# EAGLE board displayBoard (EAGLE 9.6.1)
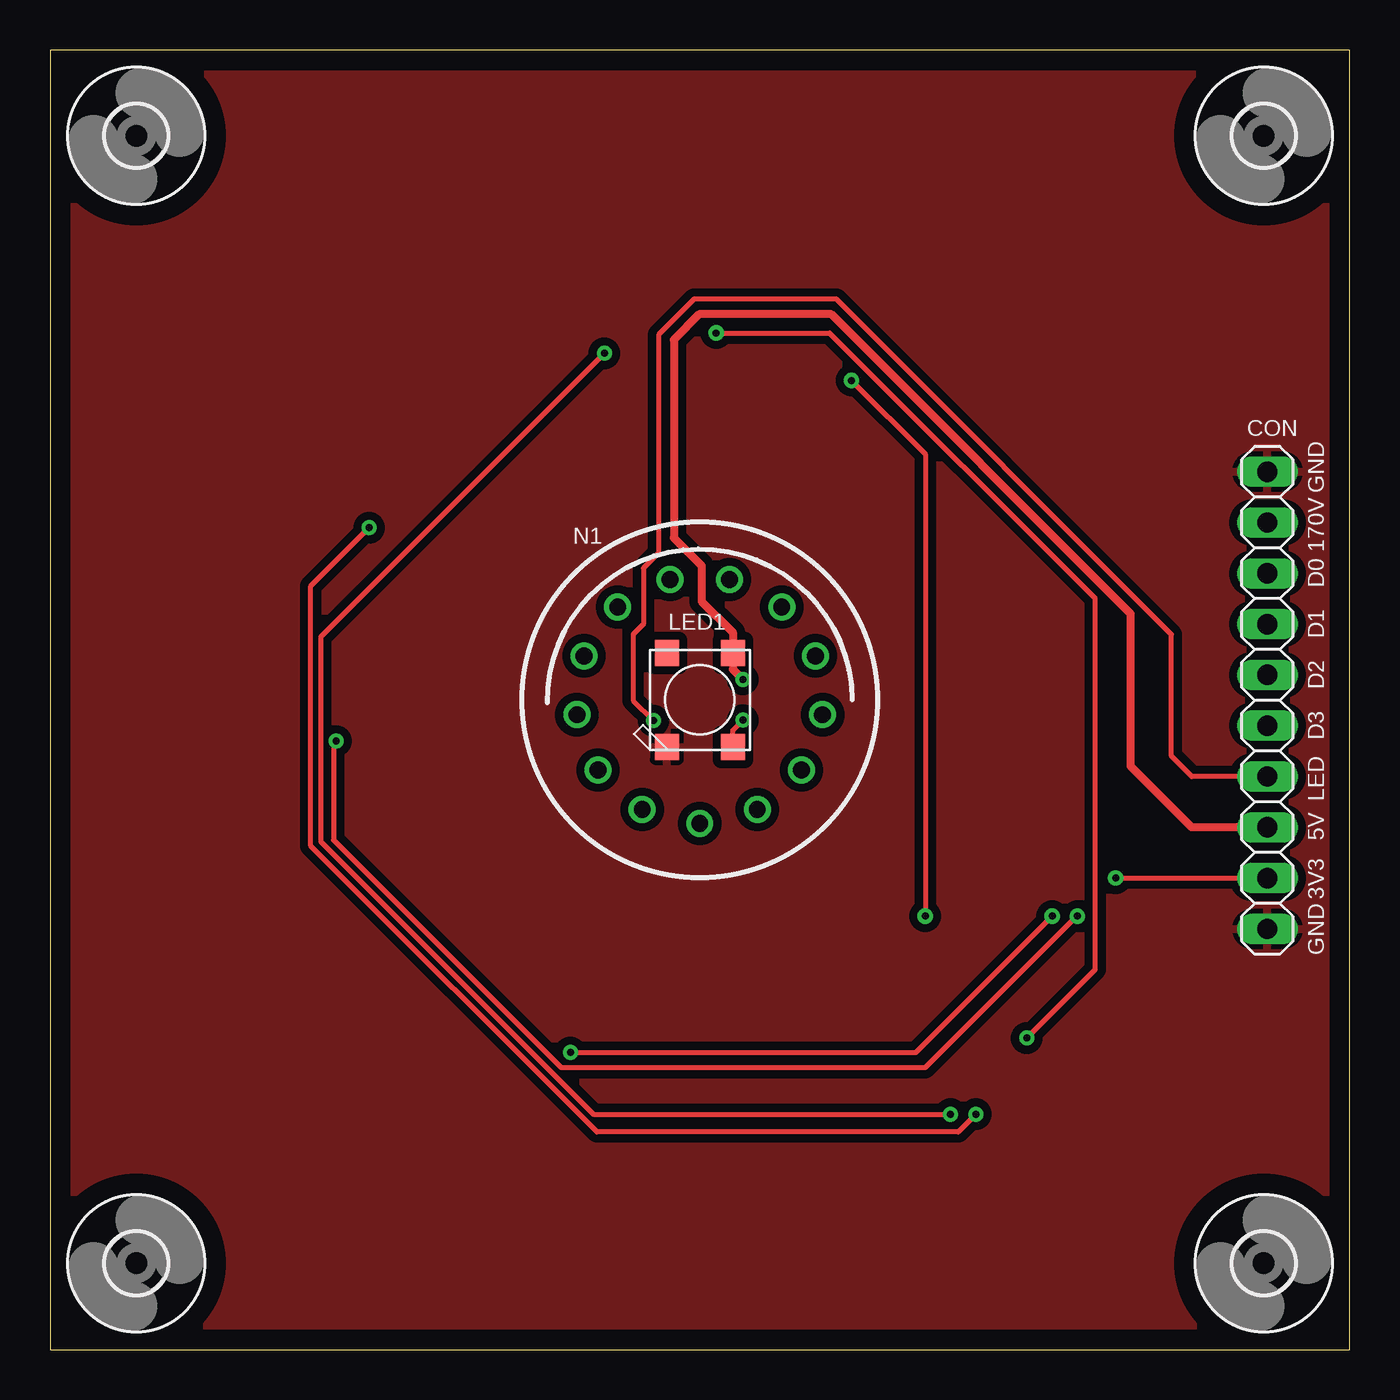
[diagram p0: board, top side]
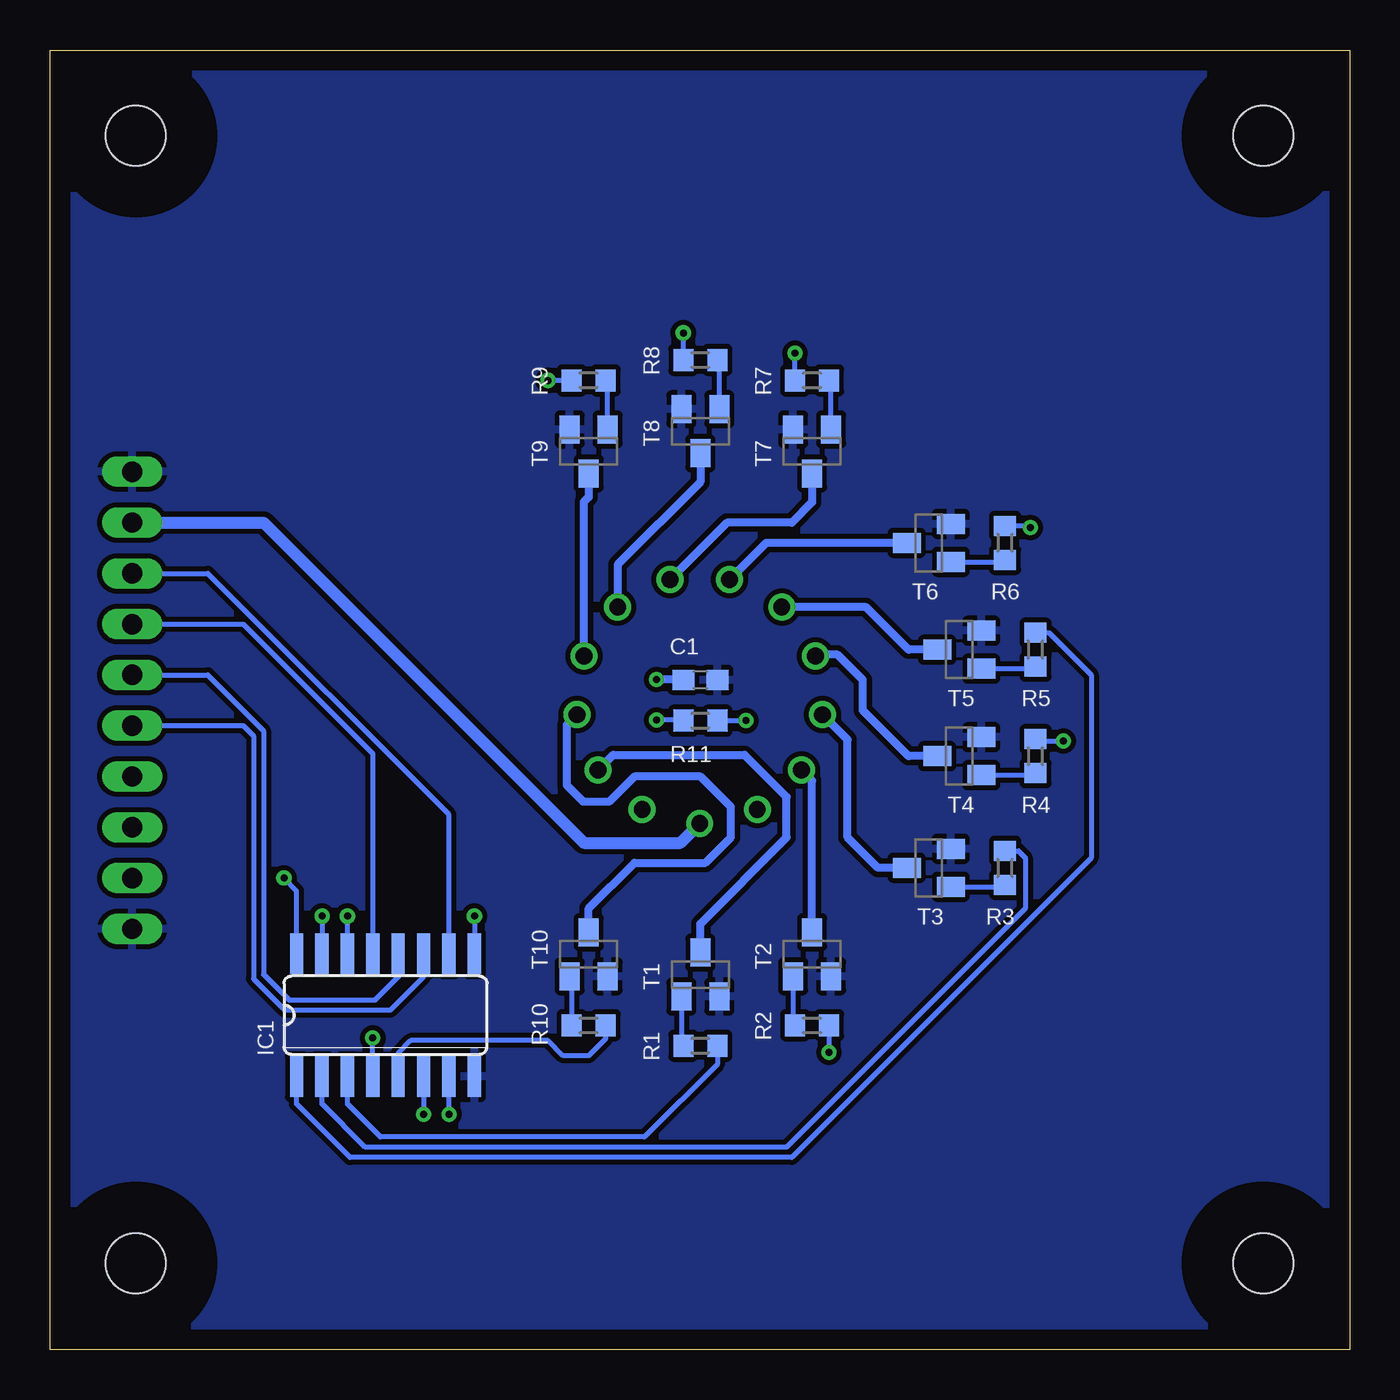
[diagram p1: board, bottom side, seen from below]

Size 65 x 65 mm. Coordinates in mm from the lower left corner, seen from the top.
Outline: 0,0 65,0 65,65 0,65 0,0
Copper layers (1*16): Top 0.035mm / dielectric 1.5mm / Bottom 0.035mm
Design rules "default *": minimum track width 6mil, minimum drill 0.35mm, track to track 10mil, track to pad 6mil, pad to pad 6mil, via to via 6mil, smd to smd 6mil, copper to edge 40mil, drill to drill 6mil, minimum pad ring 10mil, minimum via ring 8mil, stop-mask expansion 4mil, vias tented up to drill 0mil, thermal gap 10mil

## Footprints (pad centres in the part's own frame; a part is rotated, then mirrored left to right if it is on the bottom)
C0603 = smd 1.1 x 1: 1 -0.85,0; 2 0.85,0
1X10 = drill 1.016 long: 1 -11.43,0; 2 -8.89,0; 3 -6.35,0; 4 -3.81,0; 5 -1.27,0; 6 1.27,0; 7 3.81,0; 8 6.35,0; 9 8.89,0; 10 11.43,0
3,0 = hole 3: 0,0
SO16 = smd 0.66 x 2.032: 1 -4.445,-3.073; 2 -3.175,-3.073; 3 -1.905,-3.073; 4 -0.635,-3.073; 5 0.635,-3.073; 6 1.905,-3.073; 7 3.175,-3.073; 8 4.445,-3.073; 9 4.445,3.073; 10 3.175,3.073; 11 1.905,3.073; 12 0.635,3.073; 13 -0.635,3.073; 14 -1.905,3.073; 15 -3.175,3.073; 16 -4.445,3.073
WS2812B-NARROW = smd 1.3 x 1.2: 1-VDD 2.35,-1.65; 2-DOUT 2.35,1.65; 3-GND -2.35,1.65; 4-DIN -2.35,-1.65
IN-14 = drill 0.84: 0 5.094,-3.516; 1 -5.094,-3.516; 2 -6.145,-0.746; 3 -5.788,2.195; 4 -4.105,4.633; 5 -1.481,6.01; 6 1.481,6.01; 7 4.105,4.633; 8 5.788,2.195; 9 6.145,-0.746; A 0,-6.19; LHDP 2.877,-5.481; RHDP -2.877,-5.481
R0603 = smd 1 x 1.1: 1 -0.85,0; 2 0.85,0
SOT23-BEC = smd 1 x 1.4: B -0.95,-1.1; C 0,1.1; E 0.95,-1.1

## Placement (x,y rotation side)
C1  100n  [C0603]  32.47,33.49 180 bottom
CON  [1X10]  60.89,32.47 270 top
H1  MOUNT-HOLE3.0  [3,0]  60.71,60.71 0 top
H2  MOUNT-HOLE3.0  [3,0]  4.32,60.71 0 top
H3  MOUNT-HOLE3.0  [3,0]  4.32,4.32 0 top
H4  MOUNT-HOLE3.0  [3,0]  60.71,4.32 0 top
IC1  4028D  [SO16]  48.22,16.72 0 bottom
LED1  WS2812B_5050N  [WS2812B-NARROW]  32.5,32.5 90 top
N1  IN-14  [IN-14]  32.5,32.5 0 top
R1  4k7  [R0603]  32.47,15.2 180 bottom
R2  4k7  [R0603]  26.88,16.22 180 bottom
R3  4k7  [R0603]  17.23,24.09 270 bottom
R4  4k7  [R0603]  15.71,29.68 270 bottom
R5  4k7  [R0603]  15.71,35.01 270 bottom
R6  4k7  [R0603]  17.23,40.35 270 bottom
R7  4k7  [R0603]  26.88,48.47 0 bottom
R8  4k7  [R0603]  32.47,49.49 0 bottom
R9  4k7  [R0603]  38.06,48.47 0 bottom
R10  4k7  [R0603]  38.06,16.22 180 bottom
R11  470  [R0603]  32.47,31.46 180 bottom
T1  MMBTA42  [SOT23-BEC]  32.47,18.76 0 bottom
T2  MMBTA42  [SOT23-BEC]  26.88,19.77 0 bottom
T3  MMBTA42  [SOT23-BEC]  21.04,24.09 90 bottom
T4  MMBTA42  [SOT23-BEC]  19.52,29.68 90 bottom
T5  MMBTA42  [SOT23-BEC]  19.52,35.01 90 bottom
T6  MMBTA42  [SOT23-BEC]  21.04,40.35 90 bottom
T7  MMBTA42  [SOT23-BEC]  26.88,44.92 180 bottom
T8  MMBTA42  [SOT23-BEC]  32.47,45.93 180 bottom
T9  MMBTA42  [SOT23-BEC]  38.06,44.92 180 bottom
T10  MMBTA42  [SOT23-BEC]  38.06,19.77 0 bottom

## Library data of the parts
C1 R1-R11 = resistor
CON = pinhead
H1-H4 = holes
IC1 = 40xx
LED1 = adafruit
N1 = russian-nixies
T1-T10 = transistor

## Nets
+3V3: CON.9 IC1.16
+5V: C1.2 CON.8 LED1.1-VDD
D0: CON.3 IC1.10
D1: CON.4 IC1.13
D2: CON.5 IC1.12
D3: CON.6 IC1.11
DIG0: IC1.3 R1.1
DIG1: IC1.14 R2.1
DIG2: IC1.2 R3.1
DIG3: IC1.15 R4.1
DIG4: IC1.1 R5.1
DIG5: IC1.6 R6.1
DIG6: IC1.7 R7.1
DIG7: IC1.4 R8.1
DIG8: IC1.9 R9.1
DIG9: IC1.5 R10.1
GND: C1.1 CON.1 CON.10 IC1.8 LED1.3-GND T1.E T2.E T3.E T4.E T5.E T6.E T7.E T8.E T9.E T10.E
LED: CON.7 R11.1
N$1: R1.2 T1.B
N$2: R2.2 T2.B
N$3: R3.2 T3.B
N$4: R4.2 T4.B
N$5: R5.2 T5.B
N$6: R6.2 T6.B
N$7: R7.2 T7.B
N$8: R8.2 T8.B
N$9: R9.2 T9.B
N$10: R10.2 T10.B
N$11: LED1.4-DIN R11.2
NIXIE0: N1.0 T1.C
NIXIE1: N1.1 T2.C
NIXIE2: N1.2 T3.C
NIXIE3: N1.3 T4.C
NIXIE4: N1.4 T5.C
NIXIE5: N1.5 T6.C
NIXIE6: N1.6 T7.C
NIXIE7: N1.7 T8.C
NIXIE8: N1.8 T9.C
NIXIE9: N1.9 T10.C
VCC: CON.2 N1.A

## Tracks (layer width: path | path; a pad name or v marks a point on that pad's centre or on a via)
+3V3  (via drill 0.35)
  Top 0.254: v53.3,23.58 CON.9
  Bottom 0.254: IC1.16 52.66,22.95 v53.3,23.58
+5V  (via drill 0.35)
  Top 0.406: CON.8 57.11,26.12 54.06,29.17 54.06,36.79 39.08,51.78 32.47,51.78 31.2,50.51 31.2,40.6 32.6,39.2 32.6,37.42 34.15,35.87 LED1.1-VDD 34.15,34.02 v34.66,33.52
  Bottom 0.406: C1.2 33.35,33.52 v34.66,33.52
D0
  Bottom 0.254: CON.3 57.11,38.82 45.05,26.76 IC1.10
D1
  Bottom 0.254: CON.4 55.33,36.28 48.85,29.8 IC1.13
D2
  Bottom 0.254: CON.5 57.11,33.74 54.32,30.95 54.32,18.76 53.05,17.49 48.73,17.49 47.59,18.63 IC1.12
D3
  Bottom 0.254: CON.6 55.33,31.2 54.82,30.69 54.82,18.55 53.26,16.98 47.97,16.98 46.31,18.63 IC1.11
DIG0
  Bottom 0.254: R1.1 31.62,14.27 35.27,10.63 48.47,10.63 50.12,12.28 IC1.3
DIG1  (via drill 0.35)
  Top 0.254: v26.03,14.86 43.31,14.86 v50.12,21.68
  Bottom 0.254: R2.1 v26.03,14.86 | IC1.14 v50.12,21.68
DIG2
  Bottom 0.254: R3.1 16.56,24.94 16.22,24.6 16.22,22.06 28.15,10.12 49.24,10.12 51.4,12.28 IC1.2
DIG3  (via drill 0.35)
  Top 0.254: v14.31,30.44 14.18,30.31 14.18,25.49 25.57,14.1 43.77,14.1 51.35,21.68 v51.4,21.68
  Bottom 0.254: R4.1 15.62,30.44 v14.31,30.44 | v51.4,21.68 IC1.15
DIG4
  Bottom 0.254: R5.1 15.03,35.86 12.91,33.74 12.91,24.6 27.9,9.61 50,9.61 52.66,12.28 IC1.1
DIG5  (via drill 0.35)
  Top 0.254: v46.31,11.77 45.43,10.88 27.35,10.88 13.04,25.19 13.04,38.19 v15.96,41.11
  Bottom 0.254: IC1.6 v46.31,11.77 | v15.96,41.11 16.05,41.2 R6.1
DIG6  (via drill 0.35)
  Top 0.254: v27.73,49.83 13.55,35.65 13.55,25.4 27.18,11.77 v45.05,11.77
  Bottom 0.254: R7.1 v27.73,49.83 | v45.05,11.77 IC1.7
DIG7  (via drill 0.35)
  Top 0.254: v33.32,50.85 38.99,50.85 52.28,37.55 52.28,19.01 v48.85,15.58
  Bottom 0.254: R8.1 v33.32,50.85 | IC1.4 v48.85,15.58
DIG8  (via drill 0.35)
  Top 0.254: v40.09,48.47 43.77,44.79 v43.77,21.68
  Bottom 0.254: R9.1 v40.09,48.47 | v43.77,21.68 IC1.9
DIG9
  Bottom 0.254: R10.1 37.21,15.54 38.06,14.69 39.33,14.69 40.09,15.45 46.95,15.45 47.59,14.82 IC1.5
GND
  pour Bottom: 0,65.2 65.2,65.2 65.2,0 0,0
  pour Top (isolate 0.406): 0,65.23 65.23,65.23 65.23,0 0,0
LED  (via drill 0.35)
  Top 0.254: CON.7 57.11,28.66 56.09,29.68 56.09,35.77 39.33,52.54 32.22,52.54 30.44,50.76 30.44,39.84 29.68,39.08 29.68,36.28 29.17,35.77 29.17,32.47 v30.19,31.46
  Bottom 0.254: R11.1 v30.19,31.46
N$1
  Bottom 0.254: T1.B 33.42,15.3 R1.2
N$2
  Bottom 0.254: T2.B 27.83,16.32 R2.2
N$3
  Bottom 0.254: T3.B 17.33,23.14 R3.2
N$4
  Bottom 0.254: T4.B 15.81,28.73 R4.2
N$5
  Bottom 0.254: T5.B 15.81,34.06 R5.2
N$6
  Bottom 0.254: T6.B 17.33,39.4 R6.2
N$7
  Bottom 0.254: T7.B 25.93,48.37 R7.2
N$8
  Bottom 0.254: T8.B 31.52,49.39 R8.2
N$9
  Bottom 0.254: T9.B 37.11,48.37 R9.2
N$10
  Bottom 0.254: T10.B 38.91,18.57 R10.2
N$11  (via drill 0.35)
  Top 0.254: LED1.4-DIN 34.15,30.98 v34.66,31.48
  Bottom 0.254: 33.35,31.48 v34.66,31.48
  Bottom 0.406: R11.2 33.35,31.48
NIXIE0
  Bottom 0.406: T1.C 32.47,21.3 28.15,25.61 28.15,27.65 30.25,29.75 36.83,29.75 N1.0
NIXIE1
  Bottom 0.406: N1.1 26.88,28.46 T2.C
NIXIE2
  Bottom 0.254: N1.2 26.31,31.71
  Bottom 0.406: T3.C 23.58,24.09 25.11,25.61 25.11,30.5 26.31,31.71
NIXIE3
  Bottom 0.406: T4.C 22.06,29.68 24.34,31.96 24.34,33.49 25.61,34.76 26.65,34.76 N1.3
NIXIE4
  Bottom 0.406: T5.C 22.06,35.01 24.18,37.13 N1.4
NIXIE5
  Bottom 0.406: T6.C 29.18,40.35 N1.5
NIXIE6
  Bottom 0.406: T7.C 26.88,42.38 27.9,41.36 31.13,41.36 N1.6
NIXIE7
  Bottom 0.406: T8.C 32.47,43.39 36.6,39.26 N1.7
NIXIE8
  Bottom 0.406: N1.8 38.29,42.4 38.06,42.63 T9.C
NIXIE9
  Bottom 0.406: T10.C 38.06,22.06 35.77,24.34 32.22,24.34 30.95,25.61 30.95,27.14 32.47,28.66 35.77,28.66 37.04,27.39 38.31,27.39 39.15,28.23 39.15,31.25 N1.9
VCC
  Bottom 0.61: CON.2 54.32,41.36 38.3,25.34 33.47,25.34 N1.A

## Text on the board
tNames: GND | 170V | D0 | D1 | D2 | D3 | LED | 5V | 3V3 | GND